# EAGLE board USB (EAGLE 7.4.0)
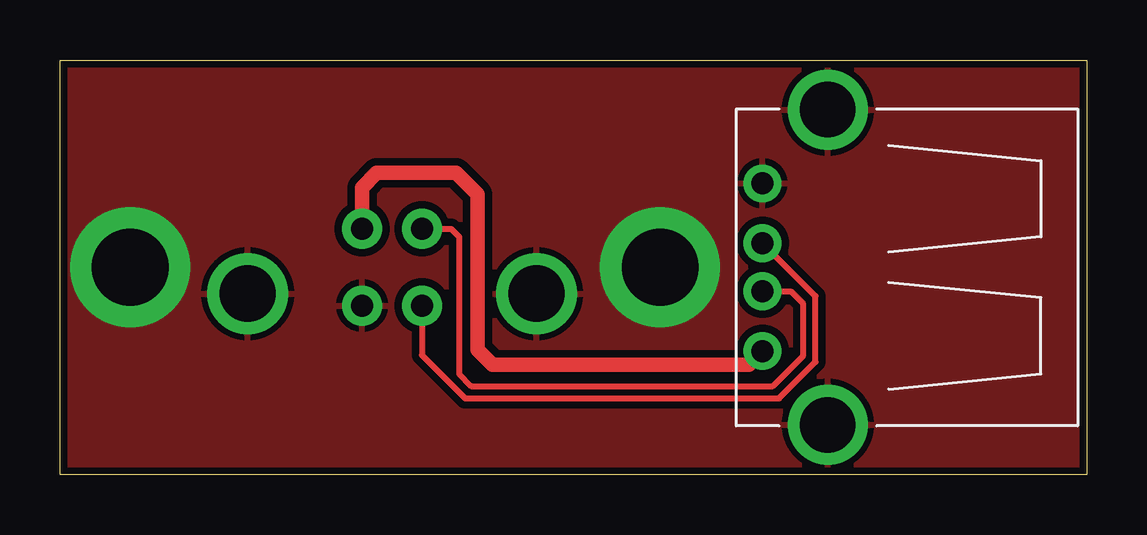
[diagram p0: board, top side]
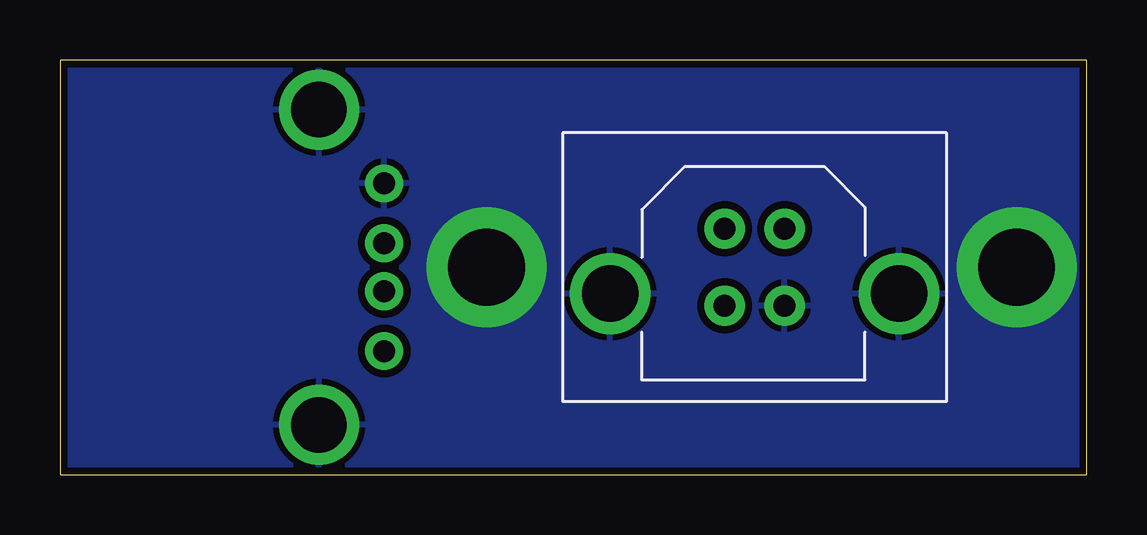
[diagram p1: board, bottom side, seen from below]

Size 42.8 x 17.27 mm. Coordinates in mm from the lower left corner, seen from the top.
Outline: 42.8,17.27 42.8,0 0,0 0,17.27 42.8,17.27
Copper layers (1*16): Top 0.035mm / dielectric 1.5mm / Bottom 0.035mm
Design rules "smiery": minimum track width 10mil, minimum drill 12mil, track to track 7mil, track to pad 5mil, pad to pad 5mil, via to via 6mil, smd to smd 0mil, copper to edge 12mil, drill to drill 10mil, minimum pad ring 13mil, minimum via ring 10mil, stop-mask expansion 2mil, vias tented up to drill 25mil, thermal gap 10mil

## Footprints (pad centres in the part's own frame; a part is rotated, then mirrored left to right if it is on the bottom)
USB-B-PTH-V = drill 0.914 pad 1.676: D+ -1.25,-1.6; D- -1.25,1.6; GND 1.25,-1.6; VBUS 1.25,1.6 | drill 2.35: S1 -6.02,-1.1; S2 6.02,-1.1
USB-A-PTH = drill 0.914: D+ 5.258,-1.003; D- 5.258,1.003; GND 5.258,-3.493; VBUS 5.258,3.493 | drill 2.311: S1 2.54,-6.566; S2 2.54,6.566

## Placement (x,y rotation side)
CONN1  USB-B-V  [USB-B-PTH-V]  13.84,8.64 0 bottom
CONN2  USB-A-H  [USB-A-PTH]  34.54,8.64 180 top

## Library data of the parts
CONN1 = igor_lbr; MANUFACTURER: CUI Devices; MPN: UJ2-BV-1-TH
CONN2 = igor_lbr

## Nets
+5V: CONN1.VBUS CONN2.VBUS
D+: CONN1.D+ CONN2.D+
D-: CONN1.D- CONN2.D-
GND: CONN1.GND CONN1.S1 CONN1.S2 CONN2.GND CONN2.S1 CONN2.S2

## Tracks (layer width: path | path; a pad name or v marks a point on that pad's centre or on a via)
+5V
  Top 0.61: CONN1.VBUS 12.59,11.96 13.21,12.57 16.51,12.57 17.4,11.68 17.4,5.21 18.03,4.57 28.71,4.57 CONN2.VBUS
D+
  Top 0.254: CONN1.D+ 15.09,4.97 16.89,3.17 29.97,3.17 31.5,4.7 31.5,7.43 CONN2.D+
D-
  Top 0.254: CONN1.D- 16.31,10.24 16.64,9.91 16.64,4.19 17.14,3.68 29.72,3.68 30.99,4.95 30.99,7.11 30.47,7.63 CONN2.D-
GND  (via drill 3.2 pad 5)
  other vias: 2.92,8.64 25.02,8.64
  pour Top (isolate 0.305): 0,17.27 0,0 42.8,0 42.8,17.27
  pour Bottom (isolate 0.305): 0,17.27 0,0 42.8,0 42.8,17.27